# EAGLE board 3PDT Buffer Board-Panelize (EAGLE 9.1.0)
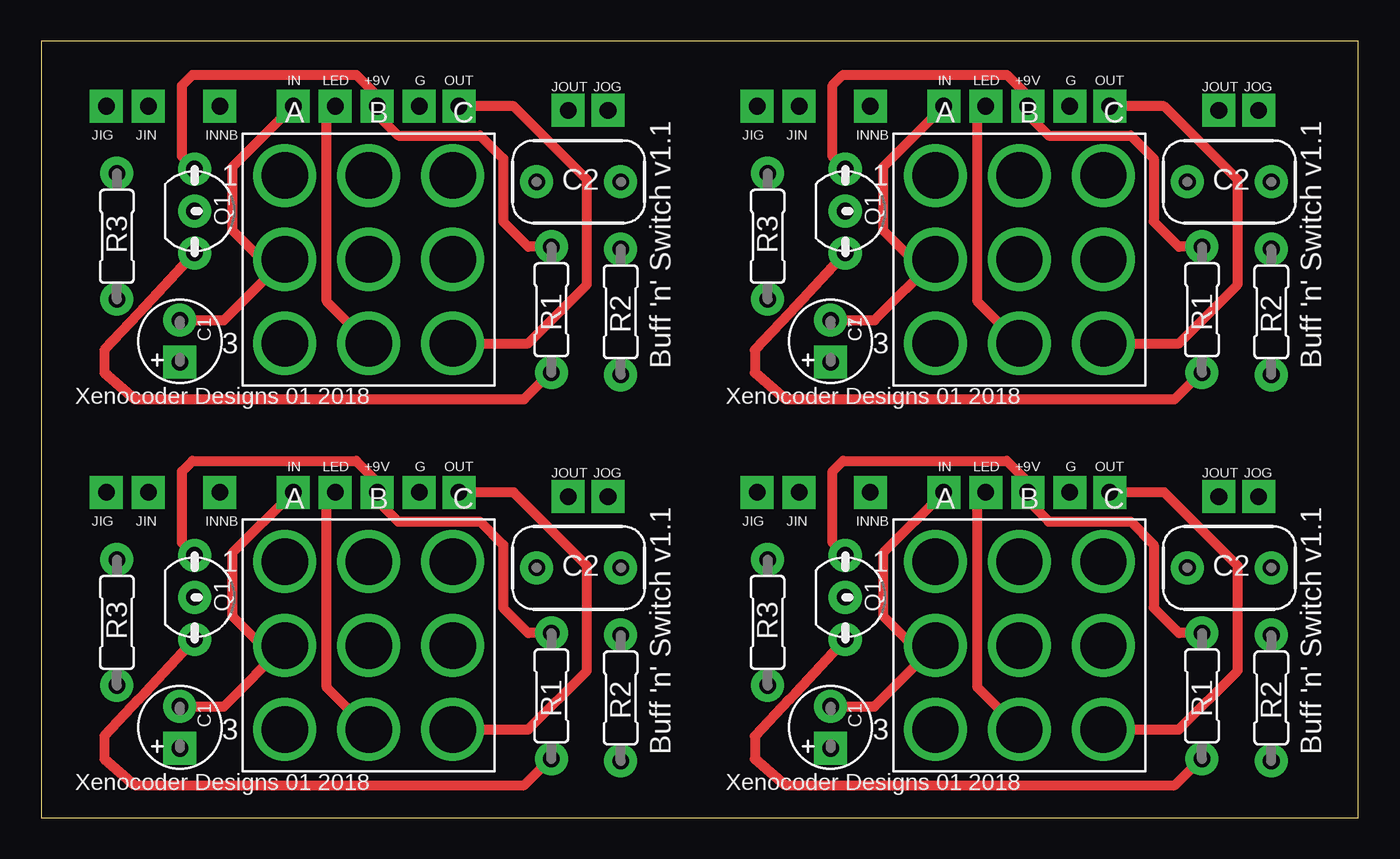
[diagram p0: board, top side]
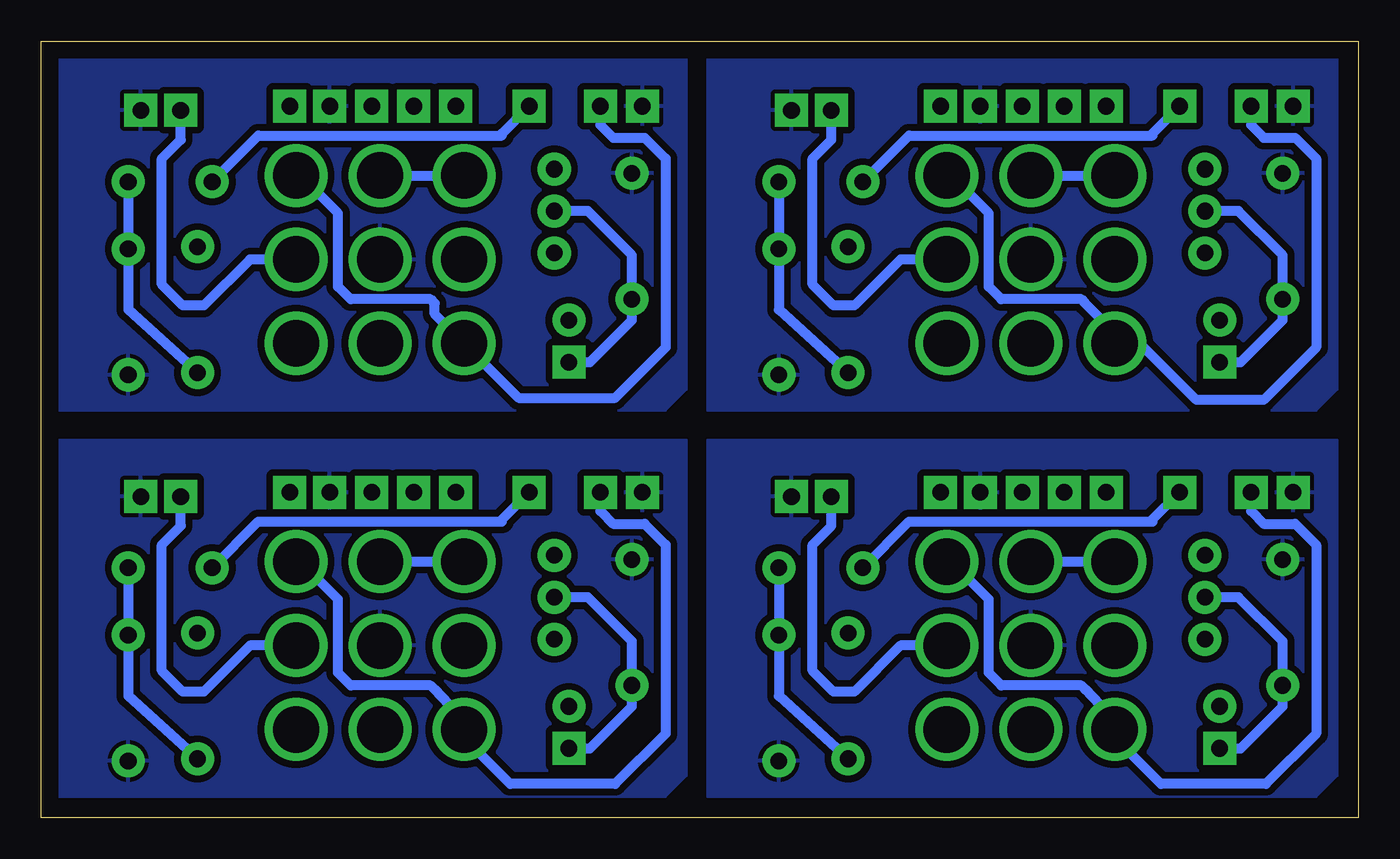
[diagram p1: board, bottom side, seen from below]

Size 79.68 x 46.98 mm. Coordinates in mm from the lower left corner, seen from the top.
Outline: 0,0 79.68,0 79.68,46.98 0,46.98 0,0
Copper layers (1*16): Top 0.035mm / dielectric 1.5mm / Bottom 0.035mm
Design rules "default": minimum track width 6mil, minimum drill 0.35mm, track to track 6mil, track to pad 6mil, pad to pad 6mil, via to via 6mil, smd to smd 6mil, copper to edge 40mil, drill to drill 6mil, minimum pad ring 10mil, minimum via ring 8mil, stop-mask expansion 4mil, vias tented up to drill 0mil, thermal gap 10mil

## Footprints (pad centres in the part's own frame; a part is rotated, then mirrored left to right if it is on the bottom)
SQUARE = drill 1 pad 2 square: 1 0,0
050_020_1 = drill 1 pad 2 square: + -1.27,0 | drill 1 pad 2: - 1.27,0
080X050 = drill 1 pad 2: 1 -2.54,0; 2 2.54,0
TO92- = drill 1 pad 2: 1 2.54,0; 2 0,0; 3 -2.54,0
R0207/3 = drill 1 pad 2: 1 -3.81,0; 2 3.81,0
3PDT = drill 2.8 pad 2: A1 -5.08,5.08; A2 -5.08,0; A3 -5.08,-5.08; B1 0,5.08; B2 0,0; B3 0,-5.08; C1 5.08,5.08; C2 5.08,0; C3 5.08,-5.08

## Placement (x,y rotation side)
+9V  +9V(T)  [SQUARE]  20.32,19.68 0 top
+9V1  +9V(T)  [SQUARE]  59.69,19.68 0 top
+9V2  +9V(T)  [SQUARE]  20.32,43.05 0 top
+9V3  +9V(T)  [SQUARE]  59.69,43.05 0 top
C1  10uF  [050_020_1]  8.38,5.46 90 top
C2  0.1uF  [080X050]  32.51,15.11 0 top
C3  10uF  [050_020_1]  47.75,5.46 90 top
C4  0.1uF  [080X050]  71.88,15.11 0 top
C5  10uF  [050_020_1]  8.38,28.83 90 top
C6  0.1uF  [080X050]  32.51,38.48 0 top
C7  10uF  [050_020_1]  47.75,28.83 90 top
C8  0.1uF  [080X050]  71.88,38.48 0 top
G  GND(T)  [SQUARE]  22.86,19.68 0 top
G1  GND(T)  [SQUARE]  62.23,19.68 0 top
G2  GND(T)  [SQUARE]  22.86,43.05 0 top
G3  GND(T)  [SQUARE]  62.23,43.05 0 top
IN  IN(T)  [SQUARE]  15.24,19.68 0 top
IN1  IN(T)  [SQUARE]  54.61,19.68 0 top
IN2  IN(T)  [SQUARE]  15.24,43.05 0 top
IN3  IN(T)  [SQUARE]  54.61,43.05 0 top
INNB  [SQUARE]  10.79,19.68 0 top
INNB1  [SQUARE]  50.16,19.68 0 top
INNB2  [SQUARE]  10.79,43.05 0 top
INNB3  [SQUARE]  50.16,43.05 0 top
JIG  GND(T)  [SQUARE]  3.94,19.68 0 top
JIG1  GND(T)  [SQUARE]  43.31,19.68 0 top
JIG2  GND(T)  [SQUARE]  3.94,43.05 0 top
JIG3  GND(T)  [SQUARE]  43.31,43.05 0 top
JIN  [SQUARE]  6.48,19.68 0 top
JIN1  [SQUARE]  45.85,19.68 0 top
JIN2  [SQUARE]  6.48,43.05 0 top
JIN3  [SQUARE]  45.85,43.05 0 top
JOG  GND(T)  [SQUARE]  34.29,19.43 0 top
JOG1  GND(T)  [SQUARE]  73.66,19.43 0 top
JOG2  GND(T)  [SQUARE]  34.29,42.8 0 top
JOG3  GND(T)  [SQUARE]  73.66,42.8 0 top
JOUT  [SQUARE]  31.88,19.43 0 top
JOUT1  [SQUARE]  71.25,19.43 0 top
JOUT2  [SQUARE]  31.88,42.8 0 top
JOUT3  [SQUARE]  71.25,42.8 0 top
LED  [SQUARE]  17.78,19.68 0 top
LED1  [SQUARE]  57.15,19.68 0 top
LED2  [SQUARE]  17.78,43.05 0 top
LED3  [SQUARE]  57.15,43.05 0 top
OUT  OUT(T)  [SQUARE]  25.27,19.68 0 top
OUT1  OUT(T)  [SQUARE]  64.64,19.68 0 top
OUT2  OUT(T)  [SQUARE]  25.27,43.05 0 top
OUT3  OUT(T)  [SQUARE]  64.64,43.05 0 top
Q1  J201  [TO92-]  9.27,13.34 270 top
Q2  J201  [TO92-]  48.64,13.34 270 top
Q3  J201  [TO92-]  9.27,36.7 270 top
Q4  J201  [TO92-]  48.64,36.7 270 top
R1  1M5  [R0207/3]  30.86,7.37 90 top
R2  1M5  [R0207/3]  35.05,7.24 90 top
R3  3k3  [R0207/3]  4.57,11.81 270 top
R4  1M5  [R0207/3]  70.23,7.37 90 top
R5  1M5  [R0207/3]  74.42,7.24 90 top
R6  3k3  [R0207/3]  43.94,11.81 270 top
R7  1M5  [R0207/3]  30.86,30.73 90 top
R8  1M5  [R0207/3]  35.05,30.61 90 top
R9  3k3  [R0207/3]  4.57,35.18 270 top
R10  1M5  [R0207/3]  70.23,30.73 90 top
R11  1M5  [R0207/3]  74.42,30.61 90 top
R12  3k3  [R0207/3]  43.94,35.18 270 top
SW1  3PDT  [3PDT]  59.18,10.41 0 top
SW2  3PDT  [3PDT]  19.81,10.41 0 top
SW3  3PDT  [3PDT]  19.81,33.78 0 top
SW4  3PDT  [3PDT]  59.18,33.78 0 top

## Library data of the parts
+9V +9V1-+9V3 G G1-G3 IN IN1-IN3 INNB INNB1-INNB3 JIG JIG1-JIG3 JIN JIN1-JIN3 JOG JOG1-JOG3 JOUT JOUT1-JOUT3 LED LED1-LED3 OUT OUT1-OUT3 = mb_supply
C1 C3 C5 C7 = mb_caps-electro
C2 C4 C6 C8 = mb_caps-chicklet
Q1-Q4 = mb_trans
R1-R12 = mb_resistors
SW1-SW4 = mb_switches

## Nets
+9V: +9V.1 Q1.3 R1.2
+9V1: +9V1.1 Q2.3 R4.2
+9V2: +9V2.1 Q3.3 R7.2
+9V3: +9V3.1 Q4.3 R10.2
GND: G.1 JIG.1 JOG.1 R2.1 R3.1 SW2.B2
GND1: G1.1 JIG1.1 JOG1.1 R5.1 R6.1 SW1.B2
GND2: G2.1 JIG2.1 JOG2.1 R8.1 R9.1 SW3.B2
GND3: G3.1 JIG3.1 JOG3.1 R11.1 R12.1 SW4.B2
IN: C1.- IN.1 SW2.A2
IN1: C3.- IN1.1 SW1.A2
IN2: C5.- IN2.1 SW3.A2
IN3: C7.- IN3.1 SW4.A2
N$1: LED.1 SW2.B3
N$2: JOUT.1 SW2.C2
N$3: SW2.A1 SW2.B1
N$4: JIN.1 SW2.A3 SW2.C1
N$5: C2.2 Q1.1 R1.1 R2.2
N$6: C2.1 INNB.1
N$7: C1.+ Q1.2 R3.2
N$8: LED1.1 SW1.B3
N$9: JOUT1.1 SW1.C2
N$10: SW1.A1 SW1.B1
N$11: JIN1.1 SW1.A3 SW1.C1
N$12: C4.2 Q2.1 R4.1 R5.2
N$13: C3.+ Q2.2 R6.2
N$14: C4.1 INNB1.1
N$15: LED2.1 SW3.B3
N$16: JOUT2.1 SW3.C2
N$17: SW3.A1 SW3.B1
N$18: JIN2.1 SW3.A3 SW3.C1
N$19: C6.2 Q3.1 R7.1 R8.2
N$20: C5.+ Q3.2 R9.2
N$21: C6.1 INNB2.1
N$22: LED3.1 SW4.B3
N$23: JOUT3.1 SW4.C2
N$24: SW4.A1 SW4.B1
N$25: JIN3.1 SW4.A3 SW4.C1
N$26: C8.2 Q4.1 R10.1 R11.2
N$27: C7.+ Q4.2 R12.2
N$28: C8.1 INNB3.1
OUT: OUT.1 SW2.C3
OUT1: OUT1.1 SW1.C3
OUT2: OUT2.1 SW3.C3
OUT3: OUT3.1 SW4.C3

## Tracks (layer width: path | path; a pad name or v marks a point on that pad's centre or on a via)
+9V
  Top 0.61: R1.2 29.46,11.18 27.94,12.7 27.94,16.51 26.54,17.91 21.59,17.91 20.32,19.18 +9V.1 20.32,20.32 19.05,21.59 9.14,21.59 8.51,20.95 8.51,16.64 Q1.3
+9V1
  Top 0.61: R4.2 68.83,11.18 67.31,12.7 67.31,16.51 65.91,17.91 60.96,17.91 59.69,19.18 +9V1.1 59.69,20.32 58.42,21.59 48.51,21.59 47.88,20.95 47.88,16.64 Q2.3
+9V2
  Top 0.61: R7.2 29.46,34.54 27.94,36.07 27.94,39.88 26.54,41.27 21.59,41.27 20.32,42.55 +9V2.1 20.32,43.69 19.05,44.96 9.14,44.96 8.51,44.32 8.51,40.01 Q3.3
+9V3
  Top 0.61: R10.2 68.83,34.54 67.31,36.07 67.31,39.88 65.91,41.27 60.96,41.27 59.69,42.55 +9V3.1 59.69,43.69 58.42,44.96 48.51,44.96 47.88,44.32 47.88,40.01 Q4.3
GND
  pour Bottom (isolate 0.406): 1.27,22.86 1.27,2.54 2.54,1.27 39.37,1.27 39.37,22.86
GND1
  pour Bottom (isolate 0.406): 40.64,22.86 40.64,2.54 41.91,1.27 78.74,1.27 78.74,22.86
GND2
  pour Bottom (isolate 0.406): 1.27,46.23 1.27,25.91 2.54,24.64 39.37,24.64 39.37,46.23
GND3
  pour Bottom (isolate 0.406): 40.64,46.23 40.64,25.91 41.91,24.64 78.74,24.64 78.74,46.23
IN
  Top 0.61: C1.- 11.05,6.73 SW2.A2 13.34,10.41 11.56,12.19 11.56,16 IN.1
IN1
  Top 0.61: C3.- 50.42,6.73 SW1.A2 52.7,10.41 50.93,12.19 50.93,16 IN1.1
IN2
  Top 0.61: C5.- 11.05,30.1 SW3.A2 13.34,33.78 11.56,35.56 11.56,39.37 IN2.1
IN3
  Top 0.61: C7.- 50.42,30.1 SW4.A2 52.7,33.78 50.93,35.56 50.93,39.37 IN3.1
N$1
  Top 0.61: SW2.B3 17.27,7.87 17.27,19.18 LED.1
N$2
  Bottom 0.61: SW2.C2 27.69,10.41 30.48,7.62 31.75,7.62 33.02,8.89 33.02,16.51 31.88,17.65 JOUT.1
N$3
  Bottom 0.61: SW2.B1 SW2.A1
N$4
  Bottom 0.61: SW2.C1 24.64,15.49 22.35,13.21 22.35,8.76 21.59,8 16.76,8 16.51,7.75 14.73,5.84 SW2.A3 14.73,4.83 11.94,2.03 5.59,2.03 2.54,5.08 2.54,16.51 3.81,17.78 5.71,17.78 6.48,18.54 JIN.1
N$5
  Top 0.61: Q1.1 6.28,7.55 5.9,7.14 3.81,4.92 3.81,3.56 5.66,1.96 29.21,1.96 30.81,3.56 R1.1
  Bottom 0.61: C2.2 R2.2 35.05,7.37 R1.1
N$6
  Bottom 0.61: C2.1 27.18,17.91 12.45,17.91 12.45,18.03 INNB.1
N$7
  Bottom 0.61: Q1.2 7.24,13.34 4.57,10.67 R3.2 4.57,6.73 7.11,4.19 C1.+
N$8
  Top 0.61: SW1.B3 56.64,7.87 56.64,19.18 LED1.1
N$9
  Bottom 0.61: SW1.C2 67.06,10.41 69.85,7.62 71.12,7.62 72.39,8.89 72.39,16.51 71.25,17.65 JOUT1.1
N$10
  Bottom 0.61: SW1.B1 SW1.A1
N$11
  Bottom 0.61: SW1.C1 64.01,15.49 61.72,13.21 61.72,8.76 60.96,8 56.13,8 55.88,7.75 54.1,5.84 SW1.A3 54.1,4.83 51.31,2.03 44.96,2.03 41.91,5.08 41.91,16.51 43.18,17.78 45.09,17.78 45.85,18.54 JIN1.1
N$12
  Top 0.61: Q2.1 45.65,7.55 45.27,7.14 43.18,4.92 43.18,3.56 45.03,1.96 68.58,1.96 70.18,3.56 R4.1
  Bottom 0.61: C4.2 R5.2 74.42,7.37 R4.1
N$13
  Bottom 0.61: Q2.2 46.61,13.34 43.94,10.67 R6.2 43.94,6.73 46.48,4.19 C3.+
N$14
  Bottom 0.61: C4.1 66.55,17.91 51.82,17.91 51.82,18.03 INNB1.1
N$15
  Top 0.61: SW3.B3 17.27,31.24 17.27,42.55 LED2.1
N$16
  Bottom 0.61: SW3.C2 27.69,33.78 30.48,30.99 31.75,30.99 33.02,32.26 33.02,39.88 31.88,41.02 JOUT2.1
N$17
  Bottom 0.61: SW3.B1 SW3.A1
N$18
  Bottom 0.152: SW3.A3 14.73,29.34
  Bottom 0.61: SW3.C1 24.64,38.86 22.35,36.58 22.35,32.13 21.59,31.37 16.76,31.37 16.51,31.11 14.73,29.34 | JIN2.1 6.48,41.91 5.71,41.15 3.81,41.15 2.54,39.88 2.54,28.45 5.71,25.27 9.78,25.27 13.21,28.7 SW3.A3
N$19
  Top 0.61: Q3.1 6.28,30.92 5.9,30.51 3.81,28.29 3.81,26.92 5.66,25.32 29.21,25.32 30.81,26.92 R7.1
  Bottom 0.61: C6.2 R8.2 35.05,30.73 R7.1
N$20
  Bottom 0.61: Q3.2 7.24,36.7 4.57,34.04 R9.2 4.57,30.1 7.11,27.56 C5.+
N$21
  Bottom 0.61: C6.1 27.18,41.27 12.45,41.27 12.45,41.4 INNB2.1
N$22
  Top 0.61: SW4.B3 56.64,31.24 56.64,42.55 LED3.1
N$23
  Bottom 0.61: SW4.C2 67.06,33.78 69.85,30.99 71.12,30.99 72.39,32.26 72.39,39.88 71.25,41.02 JOUT3.1
N$24
  Bottom 0.61: SW4.B1 SW4.A1
N$25
  Bottom 0.61: SW4.C1 64.01,38.86 61.72,36.58 61.72,32.13 60.96,31.37 56.13,31.37 55.88,31.11 55.88,30.48 SW4.A3 50.8,25.4 44.96,25.4 41.91,28.45 41.91,39.88 43.18,41.15 45.09,41.15 45.85,41.91 JIN3.1
N$26
  Top 0.61: Q4.1 45.65,30.92 45.27,30.51 43.18,28.29 43.18,26.92 45.03,25.32 68.58,25.32 70.18,26.92 R10.1
  Bottom 0.61: C8.2 R11.2 74.42,30.73 R10.1
N$27
  Bottom 0.61: Q4.2 46.61,36.7 43.94,34.04 R12.2 43.94,30.1 46.48,27.56 C7.+
N$28
  Bottom 0.61: C8.1 66.55,41.27 51.82,41.27 51.82,41.4 INNB3.1
OUT
  Top 0.61: SW2.C3 29.46,5.33 33.02,8.89 33.02,15.24 28.57,19.68 OUT.1
OUT1
  Top 0.61: SW1.C3 68.83,5.33 72.39,8.89 72.39,15.24 67.94,19.68 OUT1.1
OUT2
  Top 0.61: SW3.C3 29.46,28.7 33.02,32.26 33.02,38.61 28.57,43.05 OUT2.1
OUT3
  Top 0.61: SW4.C3 68.83,28.7 72.39,32.26 72.39,38.61 67.94,43.05 OUT3.1

## Text on the board
tNames: IN | LED | +9V | G | OUT | JOUT | JOG | IN | LED | +9V | G | OUT | JOUT | JOG | JIG | JIN | INNB | JIG | JIN | INNB | Q1 | C2 | Q1 | C2 | R3 | R3 | C1 | R1 | R2 | C1 | R1 | R2 | Buff 'n' Switch v1.1 | Buff 'n' Switch v1.1 | Xenocoder Designs 01 2018 | Xenocoder Designs 01 2018 | IN | LED | +9V | G | OUT | JOUT | JOG | IN | LED | +9V | G | OUT | JOUT | JOG | JIG | JIN | INNB | JIG | JIN | INNB | C2 | C2 | Q1 | Q1 | R3 | R3 | R1 | R2 | R1 | R2 | C1 | C1 | Buff 'n' Switch v1.1 | Buff 'n' Switch v1.1 | Xenocoder Designs 01 2018 | Xenocoder Designs 01 2018